# EAGLE board 04A-015-A1-01 (EAGLE 9.6.2)
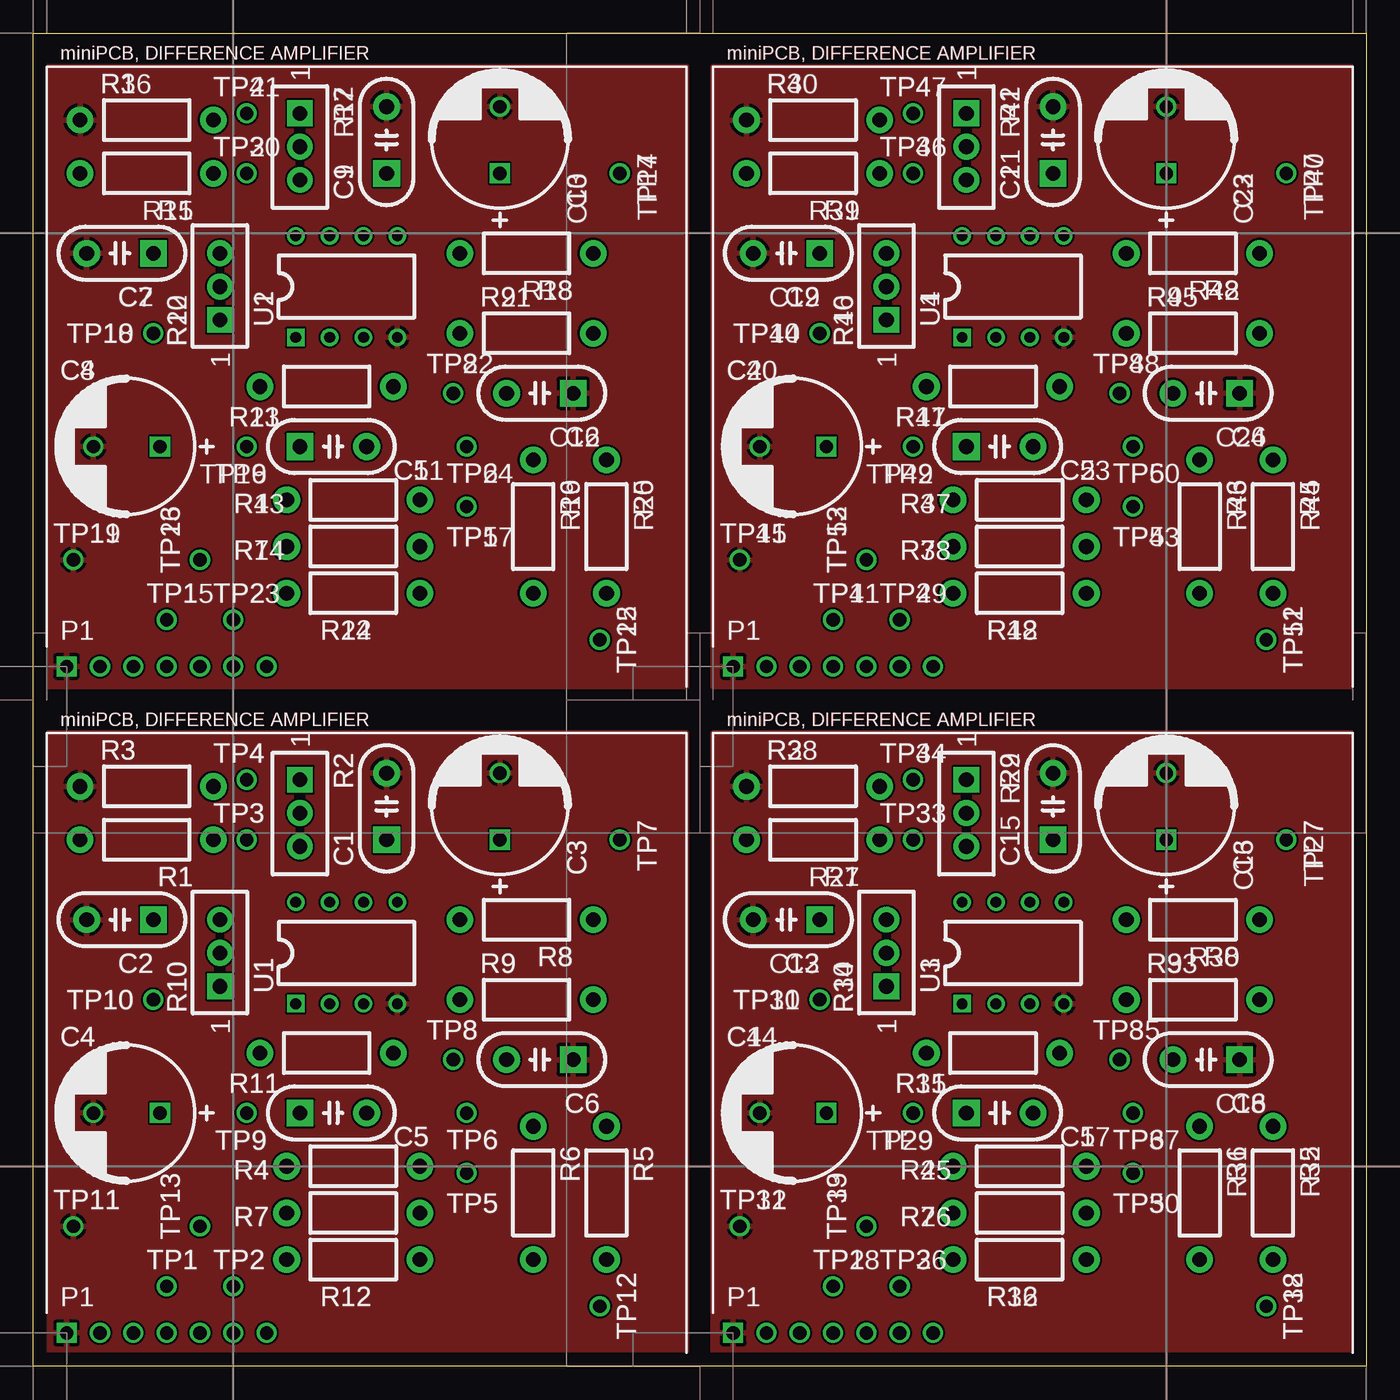
[diagram p0: board, top side]
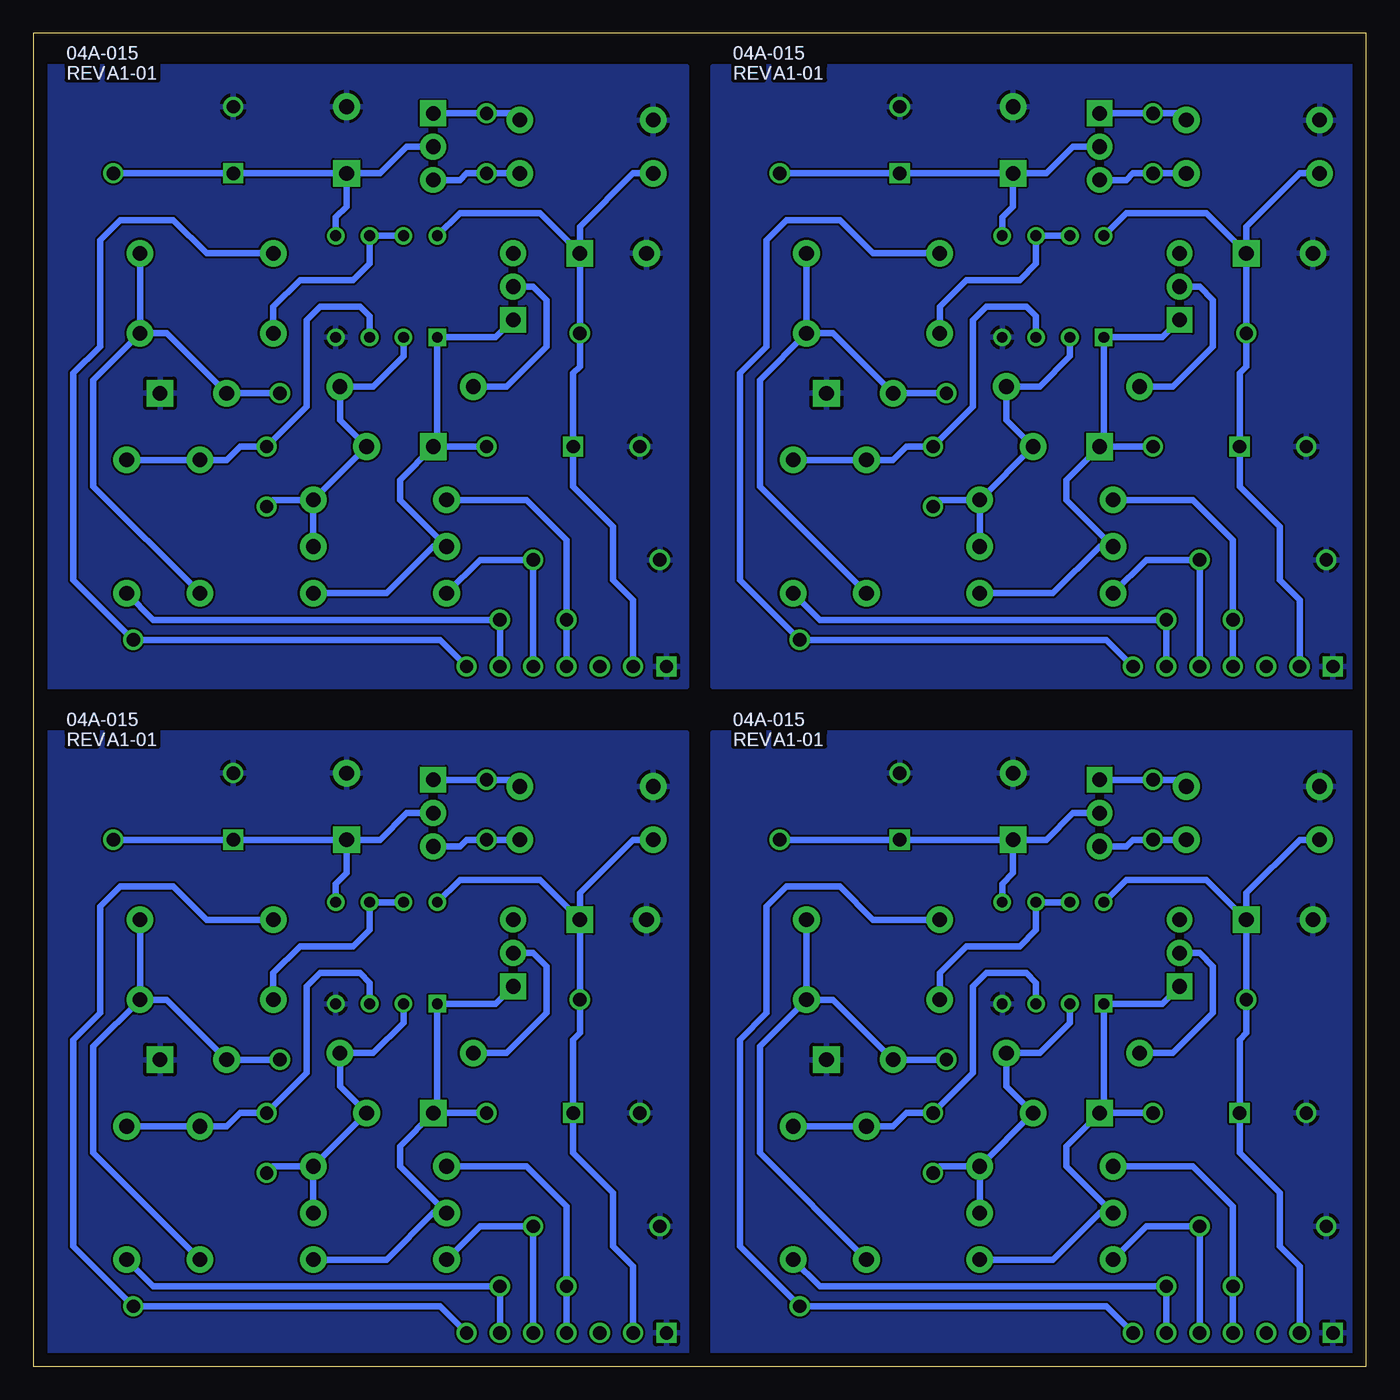
[diagram p1: board, bottom side, seen from below]

Size 100 x 100 mm. Coordinates in mm from the lower left corner, seen from the top.
Outline: 0,0 0,100 100,100 100,0 0,0
Copper layers (1*16): Top 0.035mm / dielectric 0.15mm / Bottom 0.035mm
Design rules "default": minimum track width 6mil, minimum drill 0.35mm, track to track 6mil, track to pad 6mil, pad to pad 6mil, via to via 6mil, smd to smd 6mil, copper to edge 40mil, drill to drill 6mil, minimum pad ring 10mil, minimum via ring 8mil, stop-mask expansion 4mil, vias tented up to drill 0mil, thermal gap 10mil

## Footprints (pad centres in the part's own frame; a part is rotated, then mirrored left to right if it is on the bottom)
C050-024X044 = drill 1.1 pad 2 square: 1 -2.5,0 | drill 1.1 pad 2: 2 2.5,0
C5MM = drill 1 square: + -2.5,0 | drill 1: - 2.5,0
PINS_1X7 = drill 1 square: 1 0,0 | drill 1: 2 2.5,0; 3 5,0; 4 7.5,0; 5 10,0; 6 12.5,0; 7 15,0
0207/10 = drill 1.1 pad 2: 1 -5,0; 2 5,0
TRIM_0100 = drill 1.1 pad 1.93 square: 1 0,0 | drill 1.1 pad 1.93: 2 2.5,0; 3 5,0
PINS_1_TESTPOINT_KE5000_NOTEXT = drill 1: 1 0,0
DIL08 = drill 0.813 square: 1 -3.81,-3.81 | drill 0.813: 2 -1.27,-3.81; 3 1.27,-3.81; 4 3.81,-3.81; 5 3.81,3.81; 6 1.27,3.81; 7 -1.27,3.81; 8 -3.81,3.81

## Placement (x,y rotation side)
C1  [C050-024X044]  26.5,42 90 top
C2  [C050-024X044]  6.5,33.5 180 top
C3  [C5MM]  35,42 90 top
C4  [C5MM]  7,19 180 top
C5  [C050-024X044]  22.5,19 0 top
C6  [C050-024X044]  38,23 180 top
C7  [C050-024X044]  6.5,83.5 180 top
C8  [C5MM]  7,69 180 top
C9  [C050-024X044]  26.5,92 90 top
C10  [C5MM]  35,92 90 top
C11  [C050-024X044]  22.5,69 0 top
C12  [C050-024X044]  38,73 180 top
C13  [C050-024X044]  56.5,33.5 180 top
C14  [C5MM]  57,19 180 top
C15  [C050-024X044]  76.5,42 90 top
C16  [C5MM]  85,42 90 top
C17  [C050-024X044]  72.5,19 0 top
C18  [C050-024X044]  88,23 180 top
C19  [C050-024X044]  56.5,83.5 180 top
C20  [C5MM]  57,69 180 top
C21  [C050-024X044]  76.5,92 90 top
C22  [C5MM]  85,92 90 top
C23  [C050-024X044]  72.5,69 0 top
C24  [C050-024X044]  88,73 180 top
P1  [PINS_1X7]  2.5,52.5 0 top
P2  [PINS_1X7]  2.5,2.5 0 top
P3  [PINS_1X7]  52.5,2.5 0 top
P4  [PINS_1X7]  52.5,52.5 0 top
R1  [0207/10]  8.5,39.5 180 top
R2  [TRIM_0100]  20,44 270 top
R3  [0207/10]  8.5,43.5 0 top
R4  [0207/10]  24,15 180 top
R5  [0207/10]  43,13 270 top
R6  [0207/10]  37.5,13 270 top
R7  [0207/10]  24,11.5 180 top
R8  [0207/10]  37,33.5 180 top
R9  [0207/10]  37,27.5 0 top
R10  [TRIM_0100]  14,28.5 90 top
R11  [0207/10]  22,23.5 180 top
R12  [0207/10]  24,8 180 top
R13  [0207/10]  24,65 180 top
R14  [0207/10]  24,61.5 180 top
R15  [0207/10]  8.5,89.5 180 top
R16  [0207/10]  8.5,93.5 0 top
R17  [TRIM_0100]  20,94 270 top
R18  [0207/10]  37,83.5 180 top
R19  [0207/10]  37.5,63 270 top
R20  [0207/10]  43,63 270 top
R21  [0207/10]  37,77.5 0 top
R22  [TRIM_0100]  14,78.5 90 top
R23  [0207/10]  22,73.5 180 top
R24  [0207/10]  24,58 180 top
R25  [0207/10]  74,15 180 top
R26  [0207/10]  74,11.5 180 top
R27  [0207/10]  58.5,39.5 180 top
R28  [0207/10]  58.5,43.5 0 top
R29  [TRIM_0100]  70,44 270 top
R30  [0207/10]  87,33.5 180 top
R31  [0207/10]  87.5,13 270 top
R32  [0207/10]  93,13 270 top
R33  [0207/10]  87,27.5 0 top
R34  [TRIM_0100]  64,28.5 90 top
R35  [0207/10]  72,23.5 180 top
R36  [0207/10]  74,8 180 top
R37  [0207/10]  74,65 180 top
R38  [0207/10]  74,61.5 180 top
R39  [0207/10]  58.5,89.5 180 top
R40  [0207/10]  58.5,93.5 0 top
R41  [TRIM_0100]  70,94 270 top
R42  [0207/10]  87,83.5 180 top
R43  [0207/10]  87.5,63 270 top
R44  [0207/10]  93,63 270 top
R45  [0207/10]  87,77.5 0 top
R46  [TRIM_0100]  64,78.5 90 top
R47  [0207/10]  72,73.5 180 top
R48  [0207/10]  74,58 180 top
TP1  [PINS_1_TESTPOINT_KE5000_NOTEXT]  10,6 0 top
TP2  [PINS_1_TESTPOINT_KE5000_NOTEXT]  15,6 0 top
TP3  [PINS_1_TESTPOINT_KE5000_NOTEXT]  16,39.5 0 top
TP4  [PINS_1_TESTPOINT_KE5000_NOTEXT]  16,44 0 top
TP5  [PINS_1_TESTPOINT_KE5000_NOTEXT]  32.5,14.5 0 top
TP6  [PINS_1_TESTPOINT_KE5000_NOTEXT]  32.5,19 0 top
TP7  [PINS_1_TESTPOINT_KE5000_NOTEXT]  44,39.5 270 top
TP8  [PINS_1_TESTPOINT_KE5000_NOTEXT]  31.5,23 270 top
TP9  [PINS_1_TESTPOINT_KE5000_NOTEXT]  16,19 180 top
TP10  [PINS_1_TESTPOINT_KE5000_NOTEXT]  9,27.5 270 top
TP11  [PINS_1_TESTPOINT_KE5000_NOTEXT]  3,10.5 0 top
TP12  [PINS_1_TESTPOINT_KE5000_NOTEXT]  42.5,4.5 0 top
TP13  [PINS_1_TESTPOINT_KE5000_NOTEXT]  12.5,10.5 0 top
TP14  [PINS_1_TESTPOINT_KE5000_NOTEXT]  44,89.5 270 top
TP15  [PINS_1_TESTPOINT_KE5000_NOTEXT]  10,56 0 top
TP16  [PINS_1_TESTPOINT_KE5000_NOTEXT]  16,69 180 top
TP17  [PINS_1_TESTPOINT_KE5000_NOTEXT]  32.5,64.5 0 top
TP18  [PINS_1_TESTPOINT_KE5000_NOTEXT]  9,77.5 270 top
TP19  [PINS_1_TESTPOINT_KE5000_NOTEXT]  3,60.5 0 top
TP20  [PINS_1_TESTPOINT_KE5000_NOTEXT]  16,89.5 0 top
TP21  [PINS_1_TESTPOINT_KE5000_NOTEXT]  16,94 0 top
TP22  [PINS_1_TESTPOINT_KE5000_NOTEXT]  31.5,73 270 top
TP23  [PINS_1_TESTPOINT_KE5000_NOTEXT]  15,56 0 top
TP24  [PINS_1_TESTPOINT_KE5000_NOTEXT]  32.5,69 0 top
TP25  [PINS_1_TESTPOINT_KE5000_NOTEXT]  42.5,54.5 0 top
TP26  [PINS_1_TESTPOINT_KE5000_NOTEXT]  12.5,60.5 0 top
TP27  [PINS_1_TESTPOINT_KE5000_NOTEXT]  94,39.5 270 top
TP28  [PINS_1_TESTPOINT_KE5000_NOTEXT]  60,6 0 top
TP29  [PINS_1_TESTPOINT_KE5000_NOTEXT]  66,19 180 top
TP30  [PINS_1_TESTPOINT_KE5000_NOTEXT]  82.5,14.5 0 top
TP31  [PINS_1_TESTPOINT_KE5000_NOTEXT]  59,27.5 270 top
TP32  [PINS_1_TESTPOINT_KE5000_NOTEXT]  53,10.5 0 top
TP33  [PINS_1_TESTPOINT_KE5000_NOTEXT]  66,39.5 0 top
TP34  [PINS_1_TESTPOINT_KE5000_NOTEXT]  66,44 0 top
TP35  [PINS_1_TESTPOINT_KE5000_NOTEXT]  81.5,23 270 top
TP36  [PINS_1_TESTPOINT_KE5000_NOTEXT]  65,6 0 top
TP37  [PINS_1_TESTPOINT_KE5000_NOTEXT]  82.5,19 0 top
TP38  [PINS_1_TESTPOINT_KE5000_NOTEXT]  92.5,4.5 0 top
TP39  [PINS_1_TESTPOINT_KE5000_NOTEXT]  62.5,10.5 0 top
TP40  [PINS_1_TESTPOINT_KE5000_NOTEXT]  94,89.5 270 top
TP41  [PINS_1_TESTPOINT_KE5000_NOTEXT]  60,56 0 top
TP42  [PINS_1_TESTPOINT_KE5000_NOTEXT]  66,69 180 top
TP43  [PINS_1_TESTPOINT_KE5000_NOTEXT]  82.5,64.5 0 top
TP44  [PINS_1_TESTPOINT_KE5000_NOTEXT]  59,77.5 270 top
TP45  [PINS_1_TESTPOINT_KE5000_NOTEXT]  53,60.5 0 top
TP46  [PINS_1_TESTPOINT_KE5000_NOTEXT]  66,89.5 0 top
TP47  [PINS_1_TESTPOINT_KE5000_NOTEXT]  66,94 0 top
TP48  [PINS_1_TESTPOINT_KE5000_NOTEXT]  81.5,73 270 top
TP49  [PINS_1_TESTPOINT_KE5000_NOTEXT]  65,56 0 top
TP50  [PINS_1_TESTPOINT_KE5000_NOTEXT]  82.5,69 0 top
TP51  [PINS_1_TESTPOINT_KE5000_NOTEXT]  92.5,54.5 0 top
TP52  [PINS_1_TESTPOINT_KE5000_NOTEXT]  62.5,60.5 0 top
U1  [DIL08]  23.5,31 0 top
U2  [DIL08]  23.5,81 0 top
U3  [DIL08]  73.5,31 0 top
U4  [DIL08]  73.5,81 0 top
U$1  CLASSIC-50  [PCB50]  0,0 0 top
U$2  CLASSIC-50  [PCB50]  0,50 0 top
U$3  CLASSIC-50  [PCB50]  50,0 0 top
U$4  CLASSIC-50  [PCB50]  50,50 0 top

## Library data of the parts
C1-C24 P1-P4 R1-R48 TP1-TP52 U1-U4 = minipcb
U$1-U$4 = miniPCB_BOARDS; PART_NUMBER: 04A-015; REVISION: A1-01; TITLE: miniPCB, DIFFERENCE AMPLIFIER

## Nets
GND: C1.2 C2.2 C3.- C4.- C6.1 P2.1 R3.1 TP11.1 U1.4
GND1: C7.2 C8.- C9.2 C10.- C12.1 P1.1 R16.1 TP19.1 U2.4
GND2: C13.2 C14.- C15.2 C16.- C18.1 P3.1 R28.1 TP32.1 U3.4
GND3: C19.2 C20.- C21.2 C22.- C24.1 P4.1 R40.1 TP45.1 U4.4
IN+: P2.4 R4.2 TP1.1
IN+1: P1.4 R13.2 TP15.1
IN+2: P3.4 R25.2 TP28.1
IN+3: P4.4 R37.2 TP41.1
IN-: P2.6 R5.2 TP2.1
IN-1: P1.6 R20.2 TP23.1
IN-2: P3.6 R32.2 TP36.1
IN-3: P4.6 R44.2 TP49.1
N$1: R22.2 R23.2
N$2: R34.2 R35.2
N$3: R46.2 R47.2
N$6: R10.2 R11.2
NC: P2.3
NC1: P1.3
NC2: P3.3
NC3: P4.3
OUT: C5.1 R7.2 R10.1 R12.1 TP9.1 U1.1
OUT1: C11.1 R14.2 R22.1 R24.1 TP16.1 U2.1
OUT2: C17.1 R26.2 R34.1 R36.1 TP29.1 U3.1
OUT3: C23.1 R38.2 R46.1 R48.1 TP42.1 U4.1
OUTPUT: P2.5 R12.2 TP13.1
OUTPUT1: P1.5 R24.2 TP26.1
OUTPUT2: P3.5 R36.2 TP39.1
OUTPUT3: P4.5 R48.2 TP52.1
OUTREF: P2.7 R8.2 TP12.1
OUTREF1: P1.7 R18.2 TP25.1
OUTREF2: P3.7 R30.2 TP38.1
OUTREF3: P4.7 R42.2 TP51.1
P1.1: R2.1 R3.2 TP4.1
P1.2: R15.1 R17.3 TP20.1
P1.3: R1.1 R2.3 TP3.1
P1.4: R16.2 R17.1 TP21.1
P1.5: R27.1 R29.3 TP33.1
P1.6: R28.2 R29.1 TP34.1
P1.7: R39.1 R41.3 TP46.1
P1.8: R40.2 R41.1 TP47.1
REF: C1.1 C3.+ R2.2 TP7.1 U1.5
REF1: C9.1 C10.+ R17.2 TP14.1 U2.5
REF2: C15.1 C16.+ R29.2 TP27.1 U3.5
REF3: C21.1 C22.+ R41.2 TP40.1 U4.5
V+: C2.1 C4.+ P2.2 R1.2 TP10.1 U1.8
V+1: C7.1 C8.+ P1.2 R15.2 TP18.1 U2.8
V+2: C13.1 C14.+ P3.2 R27.2 TP31.1 U3.8
V+3: C19.1 C20.+ P4.2 R39.2 TP44.1 U4.8
VFB: C5.2 R4.1 R7.1 R11.1 TP5.1 U1.2
VFB1: C11.2 R13.1 R14.1 R23.1 TP17.1 U2.2
VFB2: C17.2 R25.1 R26.1 R35.1 TP30.1 U3.2
VFB3: C23.2 R37.1 R38.1 R47.1 TP43.1 U4.2
VFBREF: R9.1 U1.6 U1.7
VFBREF1: R21.1 U2.6 U2.7
VFBREF2: R33.1 U3.6 U3.7
VFBREF3: R45.1 U4.6 U4.7
VPOS: R5.1 R6.1 TP6.1 U1.3
VPOS1: R19.1 R20.1 TP24.1 U2.3
VPOS2: R31.1 R32.1 TP37.1 U3.3
VPOS3: R43.1 R44.1 TP50.1 U4.3
VREF: C6.2 R6.2 R8.1 R9.2 TP8.1
VREF1: C12.2 R18.1 R19.2 R21.2 TP22.1
VREF2: C18.2 R30.1 R31.2 R33.2 TP35.1
VREF3: C24.2 R42.1 R43.2 R45.2 TP48.1

## Tracks (layer width: path | path; a pad name or v marks a point on that pad's centre or on a via)
GND
  pour Top: 1,1 49,1 49,47.5 1,47.5
  pour Bottom: 1,1 49,1 49,47.5 1,47.5
GND1
  pour Top: 1,51 49,51 49,97.5 1,97.5
  pour Bottom: 1,51 49,51 49,97.5 1,97.5
GND2
  pour Top: 51,1 99,1 99,47.5 51,47.5
  pour Bottom: 51,1 99,1 99,47.5 51,47.5
GND3
  pour Top: 51,51 99,51 99,97.5 51,97.5
  pour Bottom: 51,51 99,51 99,97.5 51,97.5
IN+
  Bottom 0.5: P2.4 TP1.1 10,12 13,15 R4.2
IN+1
  Bottom 0.5: P1.4 TP15.1 10,62 13,65 R13.2
IN+2
  Bottom 0.5: P3.4 TP28.1 60,12 63,15 R25.2
IN+3
  Bottom 0.5: P4.4 TP41.1 60,62 63,65 R37.2
IN-
  Bottom 0.5: P2.6 TP2.1 41,6 R5.2
IN-1
  Bottom 0.5: P1.6 TP23.1 41,56 R20.2
IN-2
  Bottom 0.5: P3.6 TP36.1 91,6 R32.2
IN-3
  Bottom 0.5: P4.6 TP49.1 91,56 R44.2
N$1
  Bottom 0.5: R23.2 14.5,73.5 11.5,76.5 11.5,80 12.5,81 R22.2
N$2
  Bottom 0.5: R35.2 64.5,23.5 61.5,26.5 61.5,30 62.5,31 R34.2
N$3
  Bottom 0.5: R47.2 64.5,73.5 61.5,76.5 61.5,80 62.5,81 R46.2
N$6
  Bottom 0.5: R11.2 14.5,23.5 11.5,26.5 11.5,30 12.5,31 R10.2
OUT
  Bottom 0.5: R10.1 15.31,27.19 U1.1 19.69,19.31 C5.1 | C5.1 22.5,16.5 22.5,15 R7.2 20,11.5 23.5,8 R12.1 | TP9.1 C5.1
OUT1
  Bottom 0.5: R22.1 15.31,77.19 U2.1 19.69,69.31 C11.1 | C11.1 22.5,66.5 22.5,65 R14.2 20,61.5 23.5,58 R24.1 | TP16.1 C11.1
OUT2
  Bottom 0.5: R34.1 65.31,27.19 U3.1 69.69,19.31 C17.1 | C17.1 72.5,16.5 72.5,15 R26.2 70,11.5 73.5,8 R36.1 | TP29.1 C17.1
OUT3
  Bottom 0.5: R46.1 65.31,77.19 U4.1 69.69,69.31 C23.1 | C23.1 72.5,66.5 72.5,65 R38.2 70,61.5 73.5,58 R48.1 | TP42.1 C23.1
OUTPUT
  Bottom 0.5: R12.2 16.5,10.5 TP13.1 P2.5
OUTPUT1
  Bottom 0.5: R24.2 16.5,60.5 TP26.1 P1.5
OUTPUT2
  Bottom 0.5: R36.2 66.5,10.5 TP39.1 P3.5
OUTPUT3
  Bottom 0.5: R48.2 66.5,60.5 TP52.1 P4.5
OUTREF
  Bottom 0.5: P2.7 19.5,4.5 TP12.1 47,9 47,24.5 45,26.5 45,34.5 43.5,36 39.5,36 37,33.5 R8.2
OUTREF1
  Bottom 0.5: P1.7 19.5,54.5 TP25.1 47,59 47,74.5 45,76.5 45,84.5 43.5,86 39.5,86 37,83.5 R18.2
OUTREF2
  Bottom 0.5: P3.7 69.5,4.5 TP38.1 97,9 97,24.5 95,26.5 95,34.5 93.5,36 89.5,36 87,33.5 R30.2
OUTREF3
  Bottom 0.5: P4.7 69.5,54.5 TP51.1 97,59 97,74.5 95,76.5 95,84.5 93.5,86 89.5,86 87,83.5 R42.2
P1.1
  Bottom 0.5: R3.2 14,44 TP4.1 R2.1
P1.2
  Bottom 0.5: R15.1 TP20.1 17.5,89.5 18,89 R17.3
P1.3
  Bottom 0.5: R1.1 TP3.1 17.5,39.5 18,39 R2.3
P1.4
  Bottom 0.5: R16.2 14,94 TP21.1 R17.1
P1.5
  Bottom 0.5: R27.1 TP33.1 67.5,39.5 68,39 R29.3
P1.6
  Bottom 0.5: R28.2 64,44 TP34.1 R29.1
P1.7
  Bottom 0.5: R39.1 TP46.1 67.5,89.5 68,89 R41.3
P1.8
  Bottom 0.5: R40.2 64,94 TP47.1 R41.1
REF
  Bottom 0.5: R2.2 22,41.5 24,39.5 C1.1 | U1.5 27.31,36.19 26.5,37 C1.1 | C1.1 C3.+ TP7.1
REF1
  Bottom 0.5: R17.2 22,91.5 24,89.5 C9.1 | U2.5 27.31,86.19 26.5,87 C9.1 | C9.1 C10.+ TP14.1
REF2
  Bottom 0.5: R29.2 72,41.5 74,39.5 C15.1 | U3.5 77.31,36.19 76.5,37 C15.1 | C15.1 C16.+ TP27.1
REF3
  Bottom 0.5: R41.2 72,91.5 74,89.5 C21.1 | U4.5 77.31,86.19 76.5,87 C21.1 | C21.1 C22.+ TP40.1
V+
  Bottom 0.5: P2.2 5,7.5 6.5,9 6.5,13 9.5,16 C4.+ 9.5,24.5 9,25 TP10.1 C2.1 | C2.1 9,35.5 5,39.5 R1.2 | U1.8 18,36.5 12,36.5 C2.1
V+1
  Bottom 0.5: P1.2 5,57.5 6.5,59 6.5,63 9.5,66 C8.+ 9.5,74.5 9,75 TP18.1 C7.1 | C7.1 9,85.5 5,89.5 R15.2 | U2.8 18,86.5 12,86.5 C7.1
V+2
  Bottom 0.5: P3.2 55,7.5 56.5,9 56.5,13 59.5,16 C14.+ 59.5,24.5 59,25 TP31.1 C13.1 | C13.1 59,35.5 55,39.5 R27.2 | U3.8 68,36.5 62,36.5 C13.1
V+3
  Bottom 0.5: P4.2 55,57.5 56.5,59 56.5,63 59.5,66 C20.+ 59.5,74.5 59,75 TP44.1 C19.1 | C19.1 59,85.5 55,89.5 R39.2 | U4.8 68,86.5 62,86.5 C19.1
VFB
  Bottom 0.5: U1.2 22.23,25.77 24.5,23.5 R11.1 27,21 C5.2 R4.1 | TP5.1 32,15 R4.1 | R7.1 R4.1
VFB1
  Bottom 0.5: U2.2 22.23,75.77 24.5,73.5 R23.1 27,71 C11.2 R13.1 | TP17.1 32,65 R13.1 | R14.1 R13.1
VFB2
  Bottom 0.5: U3.2 72.23,25.77 74.5,23.5 R35.1 77,21 C17.2 R25.1 | TP30.1 82,15 R25.1 | R26.1 R25.1
VFB3
  Bottom 0.5: U4.2 72.23,75.77 74.5,73.5 R47.1 77,71 C23.2 R37.1 | TP43.1 82,65 R37.1 | R38.1 R37.1
VFBREF
  Bottom 0.5: U1.7 U1.6 24.77,32.73 26,31.5 30,31.5 32,29.5 R9.1
VFBREF1
  Bottom 0.5: U2.7 U2.6 24.77,82.73 26,81.5 30,81.5 32,79.5 R21.1
VFBREF2
  Bottom 0.5: U3.7 U3.6 74.77,32.73 76,31.5 80,31.5 82,29.5 R33.1
VFBREF3
  Bottom 0.5: U4.7 U4.6 74.77,82.73 76,81.5 80,81.5 82,79.5 R45.1
VPOS
  Bottom 0.5: R5.1 R6.1 35.5,18 34.5,19 TP6.1 29.5,22 29.5,28.5 28.5,29.5 25.5,29.5 24.77,28.77 U1.3
VPOS1
  Bottom 0.5: R20.1 R19.1 35.5,68 34.5,69 TP24.1 29.5,72 29.5,78.5 28.5,79.5 25.5,79.5 24.77,78.77 U2.3
VPOS2
  Bottom 0.5: R32.1 R31.1 85.5,18 84.5,19 TP37.1 79.5,22 79.5,28.5 78.5,29.5 75.5,29.5 74.77,28.77 U3.3
VPOS3
  Bottom 0.5: R44.1 R43.1 85.5,68 84.5,69 TP50.1 79.5,72 79.5,78.5 78.5,79.5 75.5,79.5 74.77,78.77 U4.3
VREF
  Bottom 0.5: TP8.1 C6.2 40,27.5 R9.2 | R9.2 R8.1 | R9.2 45.5,24 45.5,16 R6.2
VREF1
  Bottom 0.5: TP22.1 C12.2 40,77.5 R21.2 | R21.2 R18.1 | R21.2 45.5,74 45.5,66 R19.2
VREF2
  Bottom 0.5: TP35.1 C18.2 90,27.5 R33.2 | R33.2 R30.1 | R33.2 95.5,24 95.5,16 R31.2
VREF3
  Bottom 0.5: TP48.1 C24.2 90,77.5 R45.2 | R45.2 R42.1 | R45.2 95.5,74 95.5,66 R43.2

## Text on the board
_tNames: R3 | R2 | R3 | R2 | TP4 | TP4 | TP3 | TP7 | TP3 | TP7 | C3 | C3 | R1 | C1 | R1 | C1 | C2 | R8 | C2 | R8 | R9 | R9 | U1 | U1 | TP10 | TP10 | R10 | R10 | TP8 | TP8 | C4 | C4 | R11 | R11 | C6 | C6 | TP9 | TP9 | C5 | TP6 | R6 | R5 | C5 | TP6 | R6 | R5 | R4 | R4 | TP11 | TP5 | TP11 | TP5 | R7 | R7 | TP13 | TP13 | TP1 | TP2 | TP1 | TP2 | R12 | R12 | TP12 | TP12 | R3 | R2 | R3 | R2 | TP4 | TP4 | TP3 | TP7 | TP3 | TP7 | C3 | C3 | R1 | C1 | R1 | C1 | C2 | R8 | C2 | R8 | R9 | R9 | U1 | U1 | TP10 | TP10 | R10 | R10 | TP8 | TP8 | C4 | C4 | R11 | R11 | C6 | C6 | TP9 | TP9 | C5 | TP6 | R6 | R5 | C5 | TP6 | R6 | R5 | R4 | R4 | TP11 | TP5 | TP11 | TP5 | R7 | R7 | TP13 | TP13 | TP1 | TP2 | TP1 | TP2 | R12 | R12 | TP12 | TP12